# EAGLE board psas-usb-connector (EAGLE 5.11)
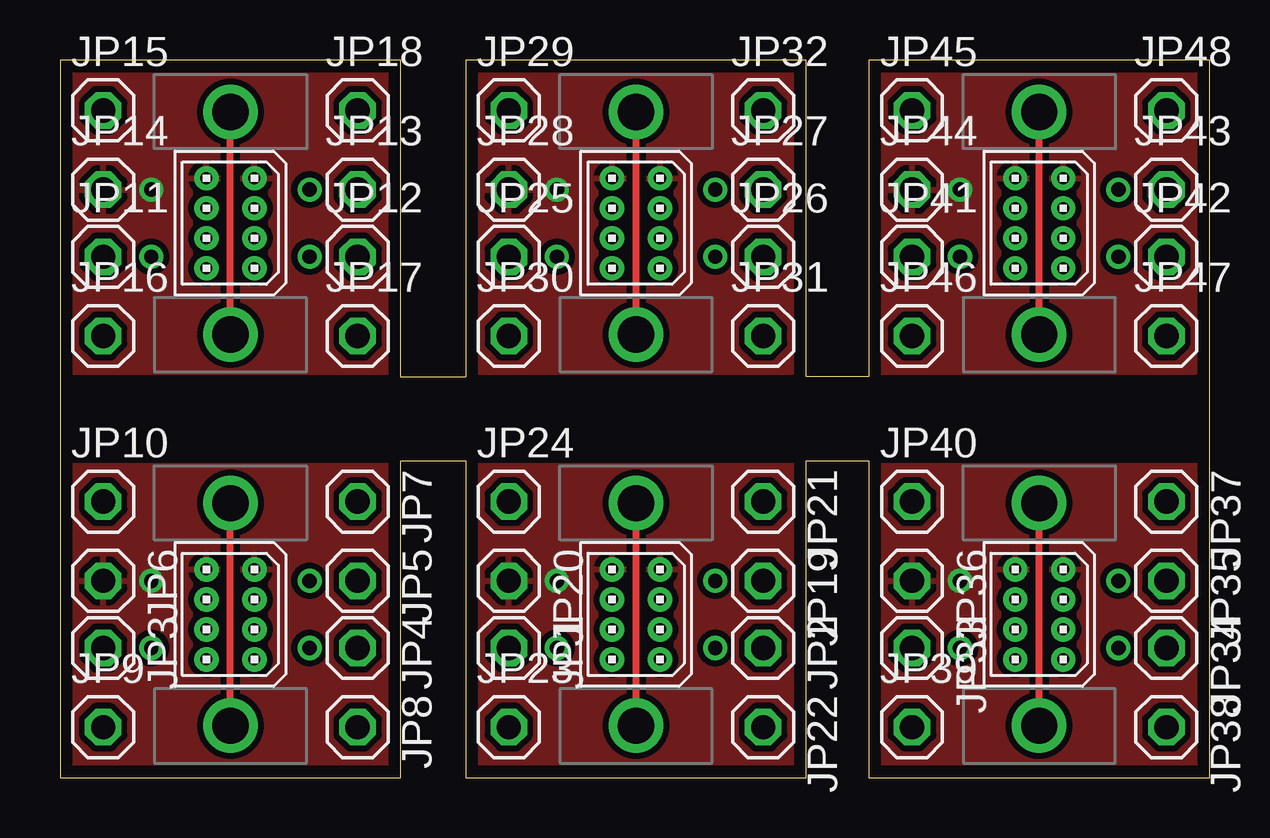
[diagram p0: board, top side]
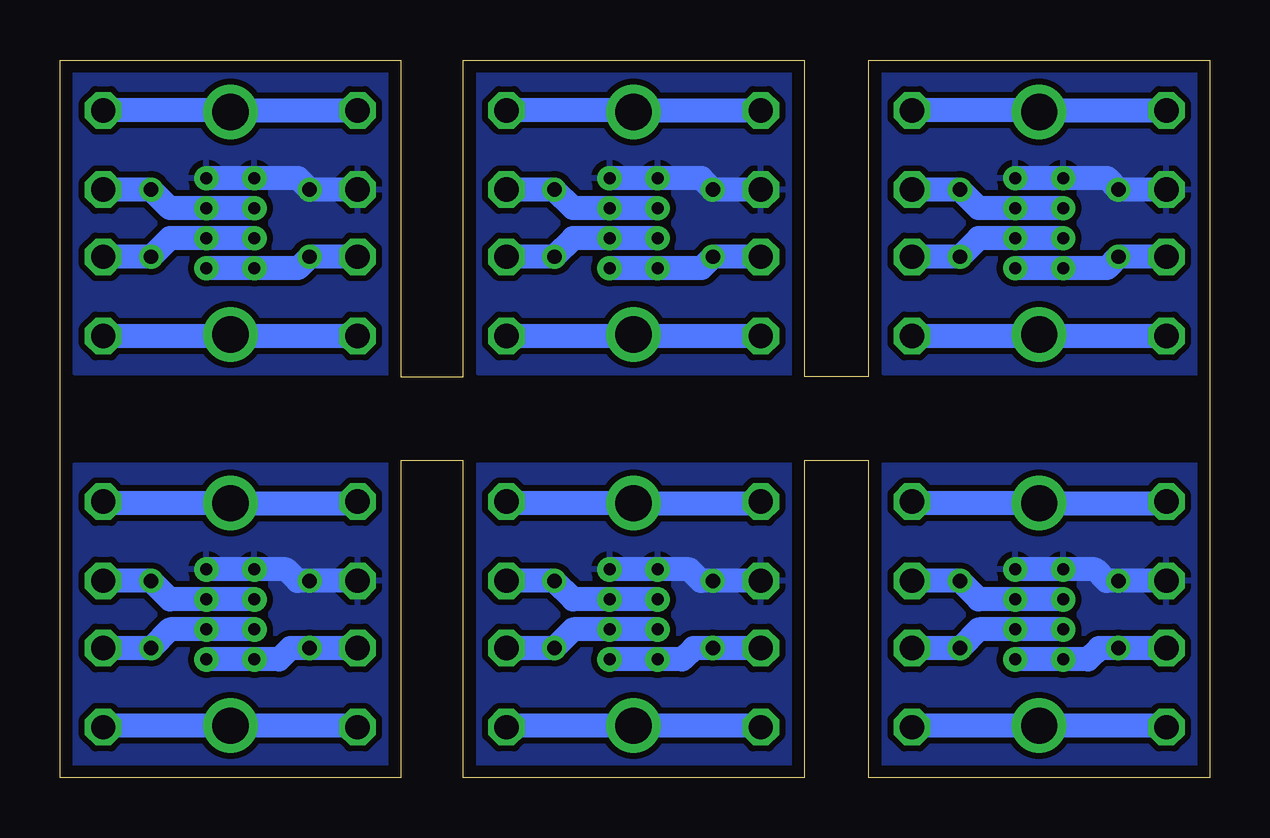
[diagram p1: board, bottom side, seen from below]

Size 47.9 x 29.9 mm. Coordinates in mm from the lower left corner, seen from the top.
Outline: 0,0 14.2,0 14.2,13.2 16.9,13.2 16.9,0 31.1,0 31.1,13.2 33.7,13.2 33.7,0 47.9,0 47.9,29.9 33.7,29.9 33.7,16.7 31.1,16.7 31.1,29.9 16.9,29.9 16.9,16.7 14.2,16.7 14.2,29.9 0,29.9 0,0
Copper layers (1*16): Top 0.0178mm / dielectric 1.4986mm / Bottom 0.0178mm
Design rules "sunstone_eagle_2lyr_rules_v1.0.0.3": minimum track width 6mil, minimum drill 14mil, track to track 6mil, track to pad 6mil, pad to pad 6mil, via to via 6mil, smd to smd 6mil, copper to edge 20mil, drill to drill 16mil, minimum pad ring 8mil, minimum via ring 8mil, stop-mask expansion 3mil, vias tented up to drill 0mil, thermal gap 10mil

## Footprints (pad centres in the part's own frame; a part is rotated, then mirrored left to right if it is on the bottom)
USB-FEMALE_PKG = drill 0.508 pad 1.016 round: 1 1,-1.875; 2 -1,-1.875; 3 1,-0.625; 4 -1,-0.625; 5 1,0.625; 6 -1,0.625; 7 1,1.875; 8 -1,1.875 | drill 1.511 round: CHASSIS@1 0,4.636; CHASSIS@2 0,-4.636
1X01 = drill 1.016 octagon: 1 0,0

## Placement (x,y rotation side)
J1  PSAS-USB-FEMALE-CONNECTOR  [USB-FEMALE_PKG]  24,6.8 0 top
J2  PSAS-USB-FEMALE-CONNECTOR  [USB-FEMALE_PKG]  7.1,23.1 0 top
J3  PSAS-USB-FEMALE-CONNECTOR  [USB-FEMALE_PKG]  7.1,6.8 0 top
J4  PSAS-USB-FEMALE-CONNECTOR  [USB-FEMALE_PKG]  24,23.1 0 top
J5  PSAS-USB-FEMALE-CONNECTOR  [USB-FEMALE_PKG]  40.8,6.8 0 top
J6  PSAS-USB-FEMALE-CONNECTOR  [USB-FEMALE_PKG]  40.8,23.1 0 top
JP1  [1X01]  18.7,5.4 270 top
JP2  [1X01]  29.3,5.4 270 top
JP3  [1X01]  1.8,5.4 270 top
JP4  [1X01]  12.4,5.4 270 top
JP5  [1X01]  12.4,8.2 270 top
JP6  [1X01]  1.8,8.2 270 top
JP7  [1X01]  12.4,11.5 270 top
JP8  [1X01]  12.4,2.1 270 top
JP9  [1X01]  1.8,2.1 0 top
JP10  [1X01]  1.8,11.5 0 top
JP11  [1X01]  1.8,21.7 0 top
JP12  [1X01]  12.4,21.7 0 top
JP13  [1X01]  12.4,24.5 0 top
JP14  [1X01]  1.8,24.5 0 top
JP15  [1X01]  1.8,27.8 0 top
JP16  [1X01]  1.8,18.4 0 top
JP17  [1X01]  12.4,18.4 0 top
JP18  [1X01]  12.4,27.8 0 top
JP19  [1X01]  29.3,8.2 270 top
JP20  [1X01]  18.7,8.2 270 top
JP21  [1X01]  29.3,11.5 270 top
JP22  [1X01]  29.3,2.1 270 top
JP23  [1X01]  18.7,2.1 0 top
JP24  [1X01]  18.7,11.5 0 top
JP25  [1X01]  18.7,21.7 0 top
JP26  [1X01]  29.3,21.7 0 top
JP27  [1X01]  29.3,24.5 0 top
JP28  [1X01]  18.7,24.5 0 top
JP29  [1X01]  18.7,27.8 0 top
JP30  [1X01]  18.7,18.4 0 top
JP31  [1X01]  29.3,18.4 0 top
JP32  [1X01]  29.3,27.8 0 top
JP33  [1X01]  35.5,5.4 270 top
JP34  [1X01]  46.1,5.4 270 top
JP35  [1X01]  46.1,8.2 270 top
JP36  [1X01]  35.5,8.2 270 top
JP37  [1X01]  46.1,11.5 270 top
JP38  [1X01]  46.1,2.1 270 top
JP39  [1X01]  35.5,2.1 0 top
JP40  [1X01]  35.5,11.5 0 top
JP41  [1X01]  35.5,21.7 0 top
JP42  [1X01]  46.1,21.7 0 top
JP43  [1X01]  46.1,24.5 0 top
JP44  [1X01]  35.5,24.5 0 top
JP45  [1X01]  35.5,27.8 0 top
JP46  [1X01]  35.5,18.4 0 top
JP47  [1X01]  46.1,18.4 0 top
JP48  [1X01]  46.1,27.8 0 top

## Library data of the parts
J1-J6 = usb-connector
JP1-JP48 = pinhead

## Nets
N$1: J1.CHASSIS@1 J1.CHASSIS@2 JP21.1 JP22.1 JP23.1 JP24.1
N$2: J4.CHASSIS@1 J4.CHASSIS@2 JP29.1 JP30.1 JP31.1 JP32.1
N$3: J5.CHASSIS@1 J5.CHASSIS@2 JP37.1 JP38.1 JP39.1 JP40.1
N$4: J2.CHASSIS@1 J2.CHASSIS@2 JP15.1 JP16.1 JP17.1 JP18.1
N$5: J6.CHASSIS@1 J6.CHASSIS@2 JP45.1 JP46.1 JP47.1 JP48.1
N$11: J3.CHASSIS@1 J3.CHASSIS@2 JP7.1 JP8.1 JP9.1 JP10.1
USB_5V: J3.1 J3.2 JP3.1
USB_5V1: J2.1 J2.2 JP11.1
USB_5V2: J1.1 J1.2 JP1.1
USB_5V3: J4.1 J4.2 JP25.1
USB_5V4: J5.1 J5.2 JP33.1
USB_5V5: J6.1 J6.2 JP41.1
USB_GND: J3.7 J3.8 JP6.1
USB_GND1: J2.7 J2.8 JP14.1
USB_GND2: J1.7 J1.8 JP20.1
USB_GND3: J4.7 J4.8 JP28.1
USB_GND4: J5.7 J5.8 JP36.1
USB_GND5: J6.7 J6.8 JP44.1
USB_H: J3.3 J3.4 JP4.1
USB_H1: J2.3 J2.4 JP12.1
USB_H2: J1.3 J1.4 JP2.1
USB_H3: J4.3 J4.4 JP26.1
USB_H4: J5.3 J5.4 JP34.1
USB_H5: J6.3 J6.4 JP42.1
USB_L: J3.5 J3.6 JP5.1
USB_L1: J2.5 J2.6 JP13.1
USB_L2: J1.5 J1.6 JP19.1
USB_L3: J4.5 J4.6 JP27.1
USB_L4: J5.5 J5.6 JP35.1
USB_L5: J6.5 J6.6 JP43.1

## Tracks (layer width: path | path; a pad name or v marks a point on that pad's centre or on a via)
N$1
  Top 0.3: J1.CHASSIS@2 J1.CHASSIS@1
  Bottom 1: JP24.1 18.77,11.44 J1.CHASSIS@1 29.23,11.44 JP21.1 | JP22.1 29.23,2.16 J1.CHASSIS@2 18.77,2.16 JP23.1
N$2
  Top 0.3: J4.CHASSIS@2 J4.CHASSIS@1
  Bottom 1: JP30.1 23.94,18.4 J4.CHASSIS@2 24.06,18.4 JP31.1 | JP32.1 24.06,27.8 J4.CHASSIS@1 23.94,27.8 JP29.1
N$3
  Top 0.3: J5.CHASSIS@2 J5.CHASSIS@1
  Bottom 1: JP40.1 35.56,11.44 J5.CHASSIS@1 46.03,11.44 JP37.1 | JP38.1 46.03,2.16 J5.CHASSIS@2 35.56,2.16 JP39.1
N$4
  Top 0.3: J2.CHASSIS@2 J2.CHASSIS@1
  Bottom 1: JP16.1 7.04,18.4 J2.CHASSIS@2 7.17,18.4 JP17.1 | JP18.1 7.17,27.8 J2.CHASSIS@1 7.04,27.8 JP15.1
N$5
  Top 0.3: J6.CHASSIS@2 J6.CHASSIS@1
  Bottom 1: JP46.1 40.74,18.4 J6.CHASSIS@2 40.86,18.4 JP47.1 | JP48.1 40.86,27.8 J6.CHASSIS@1 40.74,27.8 JP45.1
N$11
  Top 0.3: J3.CHASSIS@2 J3.CHASSIS@1
  Bottom 1: JP10.1 1.86,11.44 J3.CHASSIS@1 12.34,11.44 JP7.1 | JP8.1 12.34,2.16 J3.CHASSIS@2 1.86,2.16 JP9.1
USB_5V  (via drill 0.6)
  Bottom 1: J3.1 J3.2 5.08,4.92 4.6,5.4 v3.8,5.4 JP3.1
USB_5V1  (via drill 0.6)
  Bottom 1: J2.1 J2.2 4.28,21.23 v3.8,21.7 JP11.1
USB_5V2  (via drill 0.6)
  Bottom 1: J1.1 J1.2 21.98,4.92 21.5,5.4 v20.7,5.4 JP1.1
USB_5V3  (via drill 0.6)
  Bottom 1: J4.1 J4.2 21.18,21.23 v20.7,21.7 JP25.1
USB_5V4  (via drill 0.6)
  Bottom 1: J5.1 J5.2 38.77,4.92 38.3,5.4 v37.5,5.4 JP33.1
USB_5V5  (via drill 0.6)
  Bottom 1: J6.1 J6.2 37.98,21.23 v37.5,21.7 JP41.1
USB_GND  (via drill 0.6)
  Bottom 1: J3.7 J3.8 4.78,8.68 4.3,8.2 v3.8,8.2 JP6.1
  pour Bottom (isolate 0.254): 0,0 0,13 13.6,13 13.6,0
  pour Top (isolate 0.254): 0,0 0,13 13.6,13 13.6,0
USB_GND1  (via drill 0.6)
  Bottom 1: J2.7 J2.8 4.28,24.98 v3.8,24.5 JP14.1
  pour Bottom (isolate 0.254): 0,16.9 0,29.9 13.6,29.9 13.6,16.9
  pour Top (isolate 0.254): 0,16.9 0,29.9 13.6,29.9 13.6,16.9
USB_GND2  (via drill 0.6)
  Bottom 1: J1.7 J1.8 21.68,8.68 21.2,8.2 v20.7,8.2 JP20.1
  pour Bottom (isolate 0.254): 16.9,0 16.9,13 30.5,13 30.5,0
  pour Top (isolate 0.254): 16.9,0 16.9,13 30.5,13 30.5,0
USB_GND3  (via drill 0.6)
  Bottom 1: J4.7 J4.8 21.18,24.98 v20.7,24.5 JP28.1
  pour Bottom (isolate 0.254): 16.9,16.9 16.9,29.9 30.5,29.9 30.5,16.9
  pour Top (isolate 0.254): 16.9,16.9 16.9,29.9 30.5,29.9 30.5,16.9
USB_GND4  (via drill 0.6)
  Bottom 1: J5.7 J5.8 38.48,8.68 38,8.2 v37.5,8.2 JP36.1
  pour Bottom (isolate 0.254): 33.7,0 33.7,13 47.3,13 47.3,0
  pour Top (isolate 0.254): 33.7,0 33.7,13 47.3,13 47.3,0
USB_GND5  (via drill 0.6)
  Bottom 1: J6.7 J6.8 37.98,24.98 v37.5,24.5 JP44.1
  pour Bottom (isolate 0.254): 33.7,16.9 33.7,29.9 47.3,29.9 47.3,16.9
  pour Top (isolate 0.254): 33.7,16.9 33.7,29.9 47.3,29.9 47.3,16.9
USB_H  (via drill 0.6)
  Bottom 0.3: v10.4,5.4 12.3,5.4 12.4,5.5 JP4.1
  Bottom 1: J3.4 J3.3 9.62,6.17 v10.4,5.4 JP4.1
USB_H1  (via drill 0.6)
  Bottom 1: J2.4 J2.3 9.62,22.48 v10.4,21.7 JP12.1
USB_H2  (via drill 0.6)
  Bottom 0.3: v27.3,5.4 29.2,5.4 29.3,5.5 JP2.1
  Bottom 1: J1.4 J1.3 26.52,6.17 v27.3,5.4 JP2.1
USB_H3  (via drill 0.6)
  Bottom 1: J4.4 J4.3 26.52,22.48 v27.3,21.7 JP26.1
USB_H4  (via drill 0.6)
  Bottom 0.3: v44.1,5.4 46,5.4 46.1,5.5 JP34.1
  Bottom 1: J5.4 J5.3 43.33,6.17 v44.1,5.4 JP34.1
USB_H5  (via drill 0.6)
  Bottom 1: J6.4 J6.3 43.33,22.48 v44.1,21.7 JP42.1
USB_L  (via drill 0.6)
  Bottom 0.3: JP5.1 12.5,8.2
  Bottom 1: J3.6 J3.5 9.62,7.42 v10.4,8.2 JP5.1
USB_L1  (via drill 0.6)
  Bottom 1: J2.6 J2.5 9.62,23.73 v10.4,24.5 JP13.1
USB_L2  (via drill 0.6)
  Bottom 0.3: JP19.1 29.4,8.2
  Bottom 1: J1.6 J1.5 26.52,7.42 v27.3,8.2 JP19.1
USB_L3  (via drill 0.6)
  Bottom 1: J4.6 J4.5 26.52,23.73 v27.3,24.5 JP27.1
USB_L4  (via drill 0.6)
  Bottom 0.3: JP35.1 46.2,8.2
  Bottom 1: J5.6 J5.5 43.33,7.42 v44.1,8.2 JP35.1
USB_L5  (via drill 0.6)
  Bottom 1: J6.6 J6.5 43.33,23.73 v44.1,24.5 JP43.1